# EAGLE board schematic (EAGLE 6.6.0)
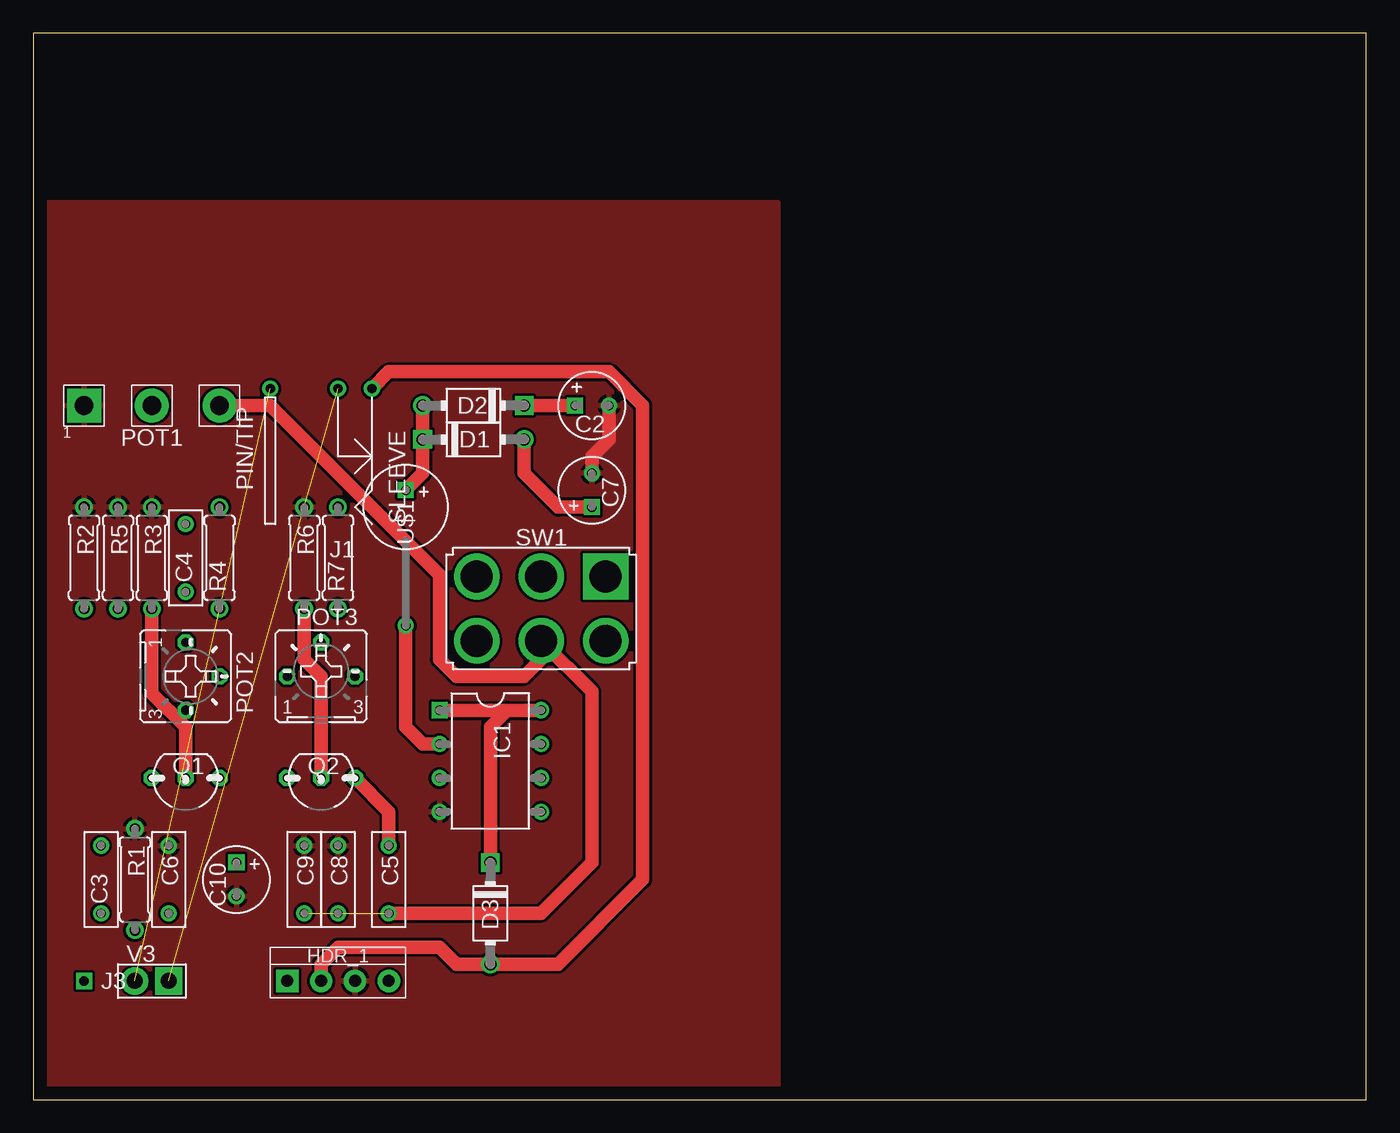
[diagram p0: board, top side]
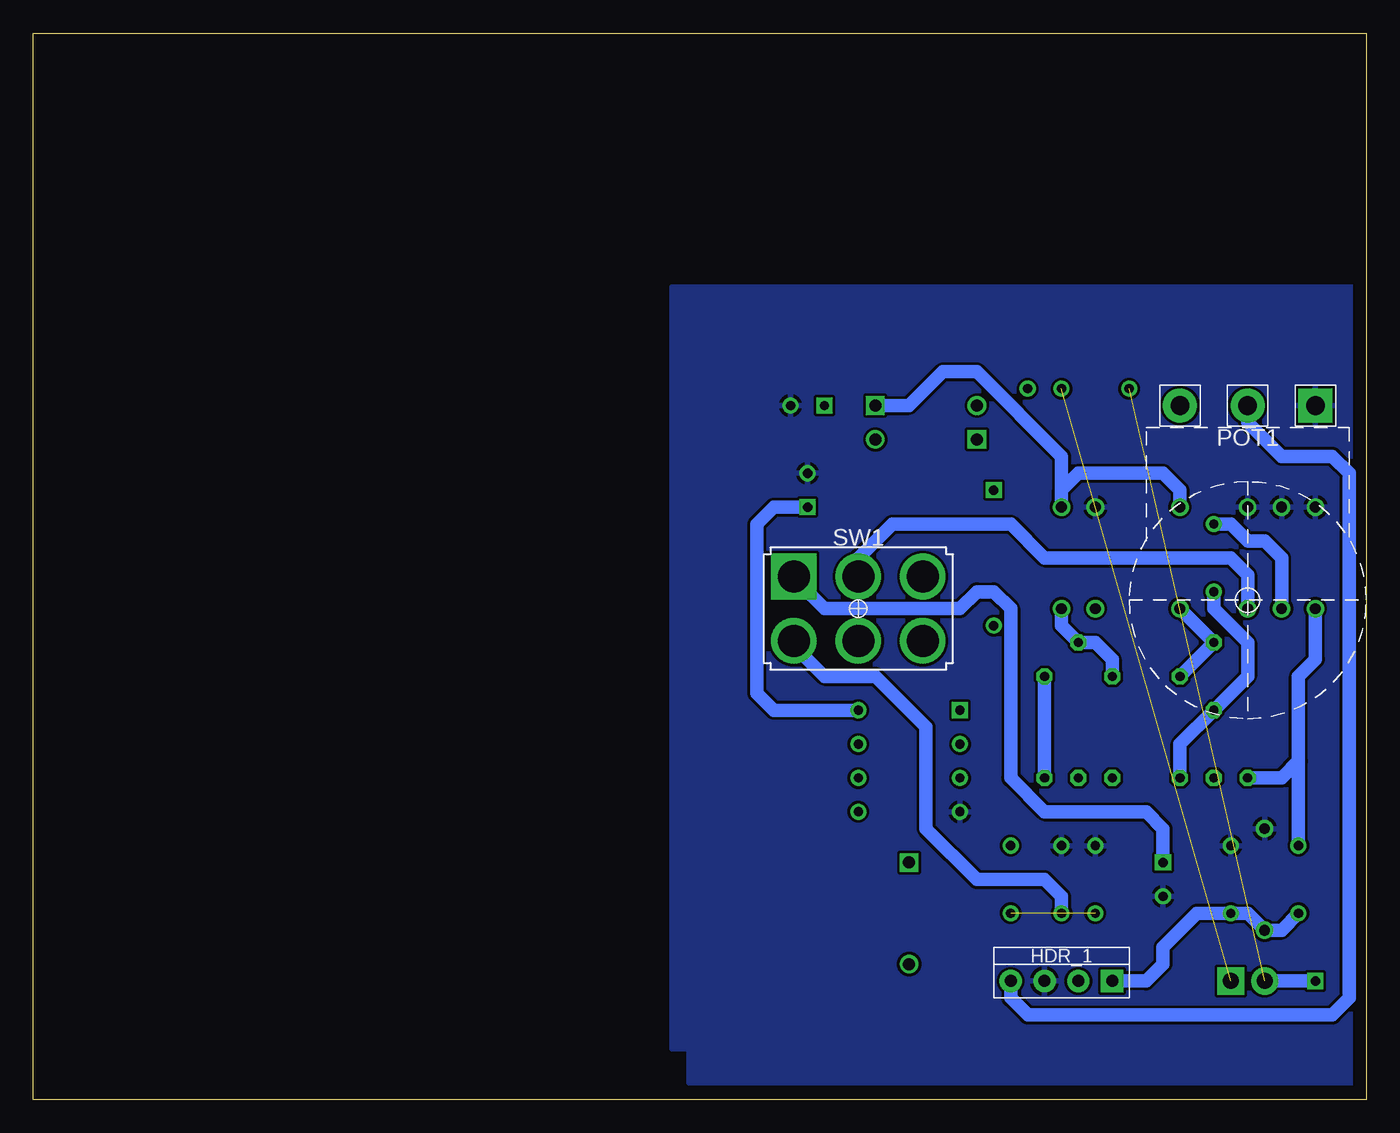
[diagram p1: board, bottom side, seen from below]

Size 100 x 80 mm. Coordinates in mm from the lower left corner, seen from the top.
Outline: 0,0 100,0 100,80 0,80 0,0
Copper layers (1*16): Top 0.035mm / dielectric 1.5mm / Bottom 0.035mm
Design rules "default": minimum track width 10mil, minimum drill 24mil, track to track 8mil, track to pad 8mil, pad to pad 8mil, via to via 8mil, smd to smd 8mil, copper to edge 40mil, drill to drill 8mil, minimum pad ring 10mil, minimum via ring 8mil, stop-mask expansion 4mil, vias tented up to drill 0mil, thermal gap 10mil

## Footprints (pad centres in the part's own frame; a part is rotated, then mirrored left to right if it is on the bottom)
050_020_1 = drill 0.7 square: + -1.27,0 | drill 0.7: - 1.27,0
072X025 = drill 0.7: 1 -2.54,0; 2 2.54,0
DO41-3 = drill 0.9: A 3.81,0 | drill 0.9 square: C -3.81,0
4PIN = drill 0.9 pad 1.676 square: P$1 -3.81,0 | drill 0.9 pad 1.676: P$2 -1.27,0; P$3 1.27,0; P$4 3.81,0
DIL08 = drill 0.7 square: 1 -3.81,-3.81 | drill 0.7: 2 -1.27,-3.81; 3 1.27,-3.81; 4 3.81,-3.81; 5 3.81,3.81; 6 1.27,3.81; 7 -1.27,3.81; 8 -3.81,3.81
DC_POWER_JACK = drill 0.7: CLOSE 7.62,-2.54; PIN 7.62,2.54; SLEEVE 7.62,-5.08
SQUARE = drill 0.7 square: 1 0,0
16MM_B.MOUNT = drill 1.4 pad 2.54 square: 1 5.08,0 | drill 1.4 pad 2.54: 2 0,0; 3 -5.08,0
B25P = drill 0.7 octagon: 1 -2.54,0; 2 0,2.54; 3 2.54,0
TO92- = drill 0.7 octagon: 1 2.54,0; 2 0,0; 3 -2.54,0
0703 = drill 0.813: 1 -3.81,0; 2 3.81,0
DPDT_SOLDER_LUG = drill 2.4 square: A1 -2.413,4.834 | drill 2.4: A2 -2.413,0.004; A3 -2.413,-4.826; B1 2.417,4.834; B2 2.417,0.004; B3 2.417,-4.826
063_025_L3 = drill 0.7 square: + -1.27,0 | drill 0.7: - 8.89,0
AB9V = drill 1.2 pad 2.032 square: + 0,1.27 | drill 1.2 pad 2.032: - 0,-1.27

## Placement (x,y rotation side)
C2  10uf  [050_020_1]  41.91,52.07 0 top
C3  220nF  [072X025]  5.08,16.51 90 top
C4  220nF  [072X025]  11.43,40.64 90 top
C5  220nF  [072X025]  26.67,16.51 270 top
C6  100pf  [072X025]  10.16,16.51 270 top
C7  10uf  [050_020_1]  41.91,45.72 90 top
C8  15nF  [072X025]  22.86,16.51 270 top
C9  1nF  [072X025]  20.32,16.51 270 top
C10  10uf  [050_020_1]  15.24,16.51 270 top
D1  1N5817  [DO41-3]  33.02,49.53 0 top
D2  1N5817  [DO41-3]  33.02,52.07 180 top
D3  1N5817  [DO41-3]  34.29,13.97 270 top
HDR_1  4PIN  [4PIN]  22.86,8.89 0 top
IC1  MAX1044  [DIL08]  34.29,25.4 270 top
J1  [DC_POWER_JACK]  20.32,45.72 90 top
J3  [SQUARE]  3.81,8.89 0 top
POT1  B250k  [16MM_B.MOUNT]  8.89,52.07 180 top
POT2  10k  [B25P]  11.43,31.75 270 top
POT3  10k  [B25P]  21.59,31.75 0 top
Q1  2N5457  [TO92-]  11.43,24.13 180 top
Q2  2N5457  [TO92-]  21.59,24.13 180 top
R1  1M  [0703]  7.62,16.51 270 top
R2  1M  [0703]  3.81,40.64 270 top
R3  680  [0703]  8.89,40.64 270 top
R4  4k7  [0703]  13.97,40.64 90 top
R5  1M  [0703]  6.35,40.64 270 top
R6  680  [0703]  20.32,40.64 270 top
R7  4k7  [0703]  22.86,40.64 90 top
SW1  [DPDT_SOLDER_LUG]  38.1,36.83 270 top
U$1  063-EUL3  [063_025_L3]  27.94,44.45 270 top
V3  [AB9V]  8.89,8.89 270 top

## Library data of the parts
C2 C7 C10 U$1 = gm-caps-electro-pol
C3-C6 C8 C9 = gm-caps-film-box
D1-D3 = gm-diodes
HDR_1 = headers
IC1 = gm-ics
J1 = gm-jacks
J3 = gm-supply
POT1 = potentiometers
POT2 POT3 = gm-pots
Q1 Q2 = gm-trans
R1-R7 = gm-resistors
SW1 = switches
V3 = supply pins

## Nets
+9V: D3.A HDR_1.P$2 J1.SLEEVE
GND: C2.- C6.1 C7.- C8.1 C9.1 C10.- HDR_1.P$3 IC1.4 POT1.1 R1.1 R2.1 R3.1 R5.1 R6.1
N$1: IC1.2 U$1.-
N$2: D1.C D2.A U$1.+
N$3: J1.CLOSE V3.+
N$4: C4.1 POT2.3 Q1.3
N$5: Q1.2 R3.2 SW1.A2
N$6: C5.2 C9.2 POT1.3 SW1.B2
N$7: Q2.2 R6.2
N$8: C4.2 R5.2
N$9: C5.1 POT3.3 Q2.3
N$10: C10.+ SW1.A1
N$11: C8.2 SW1.B1
N$13: POT2.1 POT2.2 R4.1
N$14: POT3.1 POT3.2 R7.1
N$15: J1.PIN J3.1 V3.-
N$16: C7.+ D1.A D3.C IC1.1 IC1.8
N$17: C3.2 Q1.1 R2.2
N$18: C3.1 C6.2 HDR_1.P$1 R1.2
N$19: HDR_1.P$4 POT1.2
V+: C2.+ D2.C R4.2 R7.2

## Tracks (layer width: path | path; a pad name or v marks a point on that pad's centre or on a via)
+9V
  Top 1.016: HDR_1.P$2 21.59,10.16 22.86,11.43 30.48,11.43 31.75,10.16 D3.A 39.37,10.16 45.72,16.51 45.72,52.07 43.18,54.61 26.67,54.61 J1.SLEEVE
GND
  Top 1.016: C7.- 41.91,48.26 43.18,49.53 C2.-
  pour Top: -3.81,62.23 -3.81,-2.54 57.15,-2.54 57.15,-1.27 55.88,-1.27 55.88,67.31 -3.81,67.31
  pour Bottom: 0,57.15 0,1.27 50.8,1.27 50.8,3.81 52.07,3.81 52.07,60.96 0,60.96
N$1
  Top 1.016: U$1.- 27.94,27.94 29.21,26.67 IC1.2
N$2
  Top 1.016: D2.A D1.C 29.21,46.99 U$1.+
N$3  (1 unrouted)
N$4
  Bottom 1.016: Q1.3 13.97,26.67 POT2.3 8.89,31.75 8.89,34.29 11.43,36.83 C4.1
N$5
  Top 1.016: Q1.2 11.43,27.94 8.89,30.48 R3.2
  Bottom 1.016: SW1.A2 38.1,40.64 35.56,43.18 26.67,43.18 24.13,40.64 10.16,40.64 8.89,39.37 R3.2
N$6  (1 unrouted)
  Top 1.016: POT1.3 17.78,52.07 30.48,39.37 30.48,33.02 31.75,31.75 36.83,31.75 38.1,33.02 38.1,34.29 | 38.1,34.29 SW1.B2 | SW1.B2 38.1,34.29 | C5.2 38.1,13.97 41.91,17.78 41.91,30.61 SW1.B2
N$7
  Top 1.016: R6.2 20.32,33.02 21.59,31.75 Q2.2
N$8
  Bottom 1.016: R5.2 6.35,40.64 7.62,41.91 8.89,41.91 10.16,43.18 C4.2
N$9
  Top 1.016: Q2.3 26.67,21.59 C5.1
  Bottom 1.016: POT3.3 Q2.3
N$10
  Bottom 1.016: SW1.A1 42.93,39.12 40.64,36.83 30.48,36.83 29.21,38.1 27.94,38.1 26.67,36.83 26.67,24.13 24.13,21.59 16.51,21.59 15.24,20.32 C10.+
N$11
  Bottom 1.016: SW1.B1 42.93,34.04 40.64,31.75 36.83,31.75 33.02,27.94 33.02,20.32 29.21,16.51 24.13,16.51 22.86,15.24 C8.2
N$13
  Bottom 1.016: POT2.2 POT2.1 R4.1
N$14
  Bottom 1.016: R7.1 22.86,35.56 POT3.2 20.32,34.29 19.05,33.02 POT3.1
N$15  (1 unrouted)
  Bottom 1.016: J3.1 V3.-
N$16
  Top 1.016: IC1.1 35.56,29.21 | 35.56,29.21 IC1.8 | D3.C 34.29,27.94 35.56,29.21 | C7.+ 39.37,44.45 36.83,46.99 D1.A
  Bottom 1.016: IC1.8 44.45,29.21 45.72,30.48 45.72,43.18 44.45,44.45 C7.+
N$17
  Bottom 1.016: C3.2 5.08,25.4 | 5.08,25.4 5.08,31.75 3.81,33.02 R2.2 | Q1.1 6.35,24.13 5.08,25.4
N$18
  Bottom 1.016: C3.1 6.35,12.7 R1.2 8.89,13.97 C6.2 12.7,13.97 15.24,11.43 15.24,10.16 16.51,8.89 HDR_1.P$1
N$19
  Bottom 1.016: HDR_1.P$4 26.67,7.62 25.4,6.35 2.54,6.35 1.27,7.62 1.27,46.99 2.54,48.26 6.35,48.26 8.89,50.8 POT1.2
V+
  Top 1.016: D2.C C2.+
  Bottom 1.016: D2.C 34.29,52.07 31.75,54.61 29.21,54.61 22.86,48.26 22.86,45.72 | R7.2 22.86,45.72 | 22.86,45.72 21.59,46.99 15.24,46.99 13.97,45.72 R4.2